# Altium PCB F_ROM.PcbDoc (part 3 of 3)
Units mil, origin at the board's own origin, x right, y up, seen from the top; angles counter-clockwise.
Board outline 10300 x 6600 mil, 2 copper layers (Top Layer, Bottom Layer); 788 components, 376 nets, 1392 pads, 0 vias.
Unrouted connection lines stored in the file: 465.
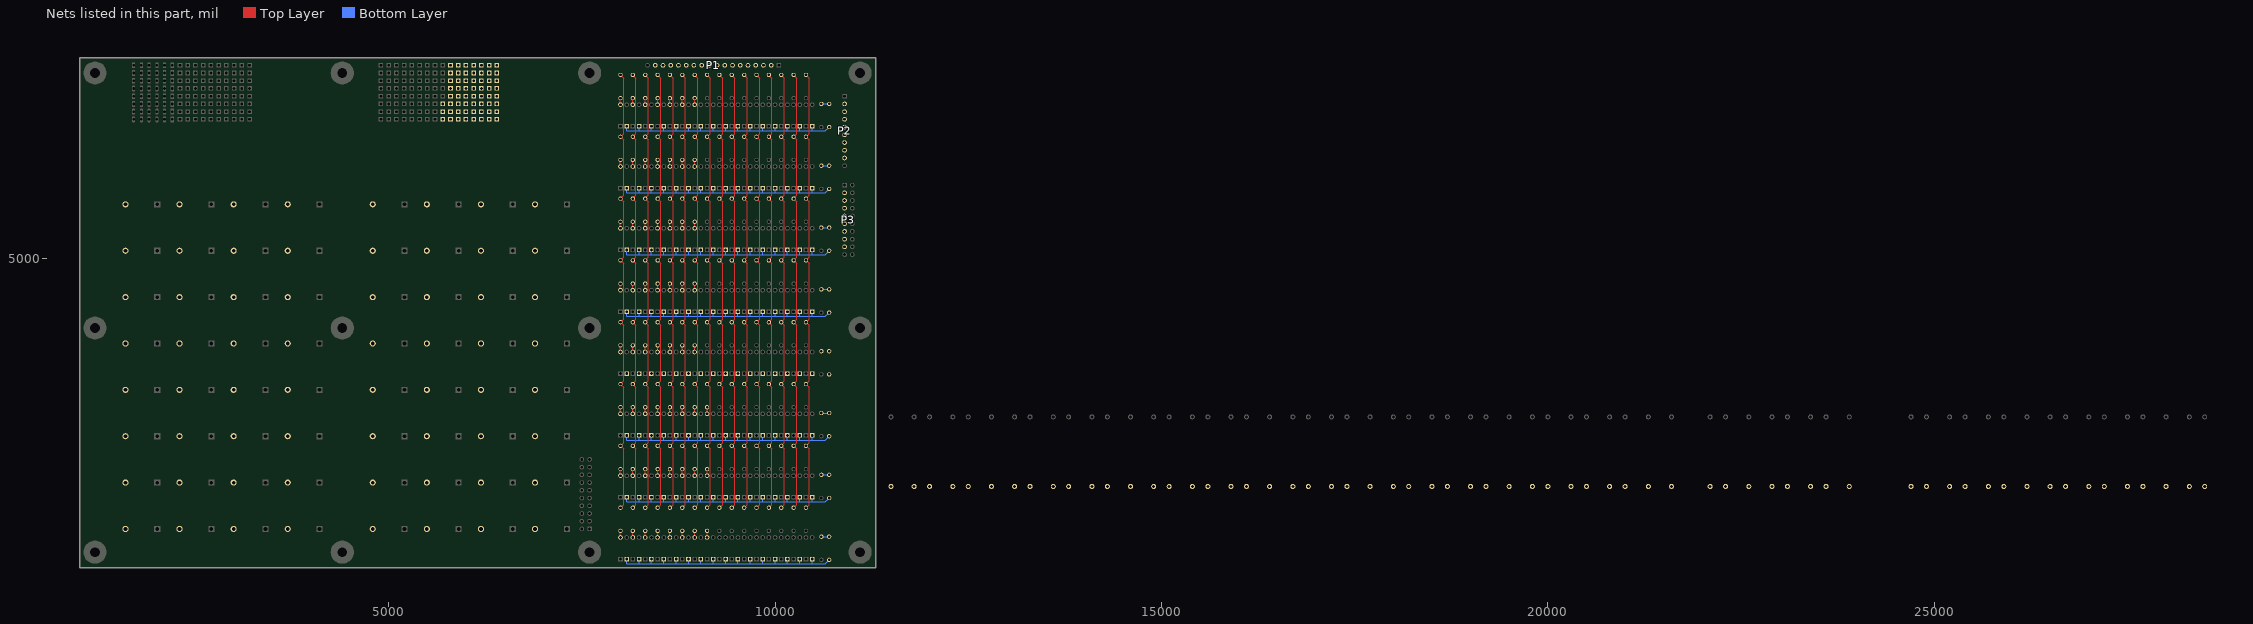
[diagram p3: the nets of this part, all layers, seen from the top]

## Nets (pads, with @x,y where several pads share a name; then routed paths per layer and width w, separated by ;. In a path a pad name is that pad's centre, name@x,y a point inside that pad or via, vN(x,y) a via of type N, cw(c..) or ccw(c..) an arc to the next point about the centre after c; other vN are vias at no path point) (continued)
NetB9_S6_1: B9_S6.1 D18_S6.1 R9_S6.1 | length 85.2
  Top Layer w6: D18_S6.1@9120,2989.76 R9_S6.1@9120,3075
NetB9_S7_1: B9_S7.1 D18_S7.1 R9_S7.1 | length 85.2
  Top Layer w6: D18_S7.1@9120,2189.76 R9_S7.1@9120,2275
NetB9_S8_1: B9_S8.1 D18_S8.1 R9_S8.1 | length 85.2
  Top Layer w6: D18_S8.1@9120,1389.76 R9_S8.1@9120,1475
NetB10_S1_1: B10_S1.1 D20_S1.1 R10_S1.1 | length 85.2
  Top Layer w6: D20_S1.1@8960,6989.76 R10_S1.1@8960,7075
NetB10_S2_1: B10_S2.1 D20_S2.1 R10_S2.1 | length 85.2
  Top Layer w6: D20_S2.1@8960,6189.76 R10_S2.1@8960,6275
NetB10_S3_1: B10_S3.1 D20_S3.1 R10_S3.1 | length 85.2
  Top Layer w6: D20_S3.1@8960,5389.76 R10_S3.1@8960,5475
NetB10_S4_1: B10_S4.1 D20_S4.1 R10_S4.1 | length 85.2
  Top Layer w6: D20_S4.1@8960,4589.76 R10_S4.1@8960,4675
NetB10_S5_1: B10_S5.1 D20_S5.1 R10_S5.1 | length 85.2
  Top Layer w6: D20_S5.1@8960,3789.76 R10_S5.1@8960,3875
NetB10_S6_1: B10_S6.1 D20_S6.1 R10_S6.1 | length 85.2
  Top Layer w6: D20_S6.1@8960,2989.76 R10_S6.1@8960,3075
NetB10_S7_1: B10_S7.1 D20_S7.1 R10_S7.1 | length 85.2
  Top Layer w6: D20_S7.1@8960,2189.76 R10_S7.1@8960,2275
NetB10_S8_1: B10_S8.1 D20_S8.1 R10_S8.1 | length 85.2
  Top Layer w6: D20_S8.1@8960,1389.76 R10_S8.1@8960,1475
NetB11_S1_1: B11_S1.1 D22_S1.1 R11_S1.1 | length 85.2
  Top Layer w6: D22_S1.1@8800,6989.76 R11_S1.1@8800,7075
NetB11_S2_1: B11_S2.1 D22_S2.1 R11_S2.1 | length 85.2
  Top Layer w6: D22_S2.1@8800,6189.76 R11_S2.1@8800,6275
NetB11_S3_1: B11_S3.1 D22_S3.1 R11_S3.1 | length 85.2
  Top Layer w6: D22_S3.1@8800,5389.76 R11_S3.1@8800,5475
NetB11_S4_1: B11_S4.1 D22_S4.1 R11_S4.1 | length 85.2
  Top Layer w6: D22_S4.1@8800,4589.76 R11_S4.1@8800,4675
NetB11_S5_1: B11_S5.1 D22_S5.1 R11_S5.1 | length 85.2
  Top Layer w6: D22_S5.1@8800,3789.76 R11_S5.1@8800,3875
NetB11_S6_1: B11_S6.1 D22_S6.1 R11_S6.1 | length 85.2
  Top Layer w6: D22_S6.1@8800,2989.76 R11_S6.1@8800,3075
NetB11_S7_1: B11_S7.1 D22_S7.1 R11_S7.1 | length 85.2
  Top Layer w6: D22_S7.1@8800,2189.76 R11_S7.1@8800,2275
NetB11_S8_1: B11_S8.1 D22_S8.1 R11_S8.1 | length 85.2
  Top Layer w6: D22_S8.1@8800,1389.76 R11_S8.1@8800,1475
NetB12_S1_1: B12_S1.1 D24_S1.1 R12_S1.1 | length 85.2
  Top Layer w6: D24_S1.1@8640,6989.76 R12_S1.1@8640,7075
NetB12_S2_1: B12_S2.1 D24_S2.1 R12_S2.1 | length 85.2
  Top Layer w6: D24_S2.1@8640,6189.76 R12_S2.1@8640,6275
NetB12_S3_1: B12_S3.1 D24_S3.1 R12_S3.1 | length 85.2
  Top Layer w6: D24_S3.1@8640,5389.76 R12_S3.1@8640,5475
NetB12_S4_1: B12_S4.1 D24_S4.1 R12_S4.1 | length 85.2
  Top Layer w6: D24_S4.1@8640,4589.76 R12_S4.1@8640,4675
NetB12_S5_1: B12_S5.1 D24_S5.1 R12_S5.1 | length 85.2
  Top Layer w6: D24_S5.1@8640,3789.76 R12_S5.1@8640,3875
NetB12_S6_1: B12_S6.1 D24_S6.1 R12_S6.1 | length 85.2
  Top Layer w6: D24_S6.1@8640,2989.76 R12_S6.1@8640,3075
NetB12_S7_1: B12_S7.1 D24_S7.1 R12_S7.1 | length 85.2
  Top Layer w6: D24_S7.1@8640,2189.76 R12_S7.1@8640,2275
NetB12_S8_1: B12_S8.1 D24_S8.1 R12_S8.1 | length 85.2
  Top Layer w6: D24_S8.1@8640,1389.76 R12_S8.1@8640,1475
NetB13_S1_1: B13_S1.1 D26_S1.1 R13_S1.1 | length 85.2
  Top Layer w6: D26_S1.1@8480,6989.76 R13_S1.1@8480,7075
NetB13_S2_1: B13_S2.1 D26_S2.1 R13_S2.1 | length 85.2
  Top Layer w6: D26_S2.1@8480,6189.76 R13_S2.1@8480,6275
NetB13_S3_1: B13_S3.1 D26_S3.1 R13_S3.1 | length 85.2
  Top Layer w6: D26_S3.1@8480,5389.76 R13_S3.1@8480,5475
NetB13_S4_1: B13_S4.1 D26_S4.1 R13_S4.1 | length 85.2
  Top Layer w6: D26_S4.1@8480,4589.76 R13_S4.1@8480,4675
NetB13_S5_1: B13_S5.1 D26_S5.1 R13_S5.1 | length 85.2
  Top Layer w6: D26_S5.1@8480,3789.76 R13_S5.1@8480,3875
NetB13_S6_1: B13_S6.1 D26_S6.1 R13_S6.1 | length 85.2
  Top Layer w6: D26_S6.1@8480,2989.76 R13_S6.1@8480,3075
NetB13_S7_1: B13_S7.1 D26_S7.1 R13_S7.1 | length 85.2
  Top Layer w6: D26_S7.1@8480,2189.76 R13_S7.1@8480,2275
NetB13_S8_1: B13_S8.1 D26_S8.1 R13_S8.1 | length 85.2
  Top Layer w6: D26_S8.1@8480,1389.76 R13_S8.1@8480,1475
NetB14_S1_1: B14_S1.1 D28_S1.1 R14_S1.1 | length 85.2
  Top Layer w6: D28_S1.1@8320,6989.76 R14_S1.1@8320,7075
NetB14_S2_1: B14_S2.1 D28_S2.1 R14_S2.1 | length 85.2
  Top Layer w6: D28_S2.1@8320,6189.76 R14_S2.1@8320,6275
NetB14_S3_1: B14_S3.1 D28_S3.1 R14_S3.1 | length 85.2
  Top Layer w6: D28_S3.1@8320,5389.76 R14_S3.1@8320,5475
NetB14_S4_1: B14_S4.1 D28_S4.1 R14_S4.1 | length 85.2
  Top Layer w6: D28_S4.1@8320,4589.76 R14_S4.1@8320,4675
NetB14_S5_1: B14_S5.1 D28_S5.1 R14_S5.1 | length 85.2
  Top Layer w6: D28_S5.1@8320,3789.76 R14_S5.1@8320,3875
NetB14_S6_1: B14_S6.1 D28_S6.1 R14_S6.1 | length 85.2
  Top Layer w6: D28_S6.1@8320,2989.76 R14_S6.1@8320,3075
NetB14_S7_1: B14_S7.1 D28_S7.1 R14_S7.1 | length 85.2
  Top Layer w6: D28_S7.1@8320,2189.76 R14_S7.1@8320,2275
NetB14_S8_1: B14_S8.1 D28_S8.1 R14_S8.1 | length 85.2
  Top Layer w6: D28_S8.1@8320,1389.76 R14_S8.1@8320,1475
NetB15_S1_1: B15_S1.1 D30_S1.1 R15_S1.1 | length 85.2
  Top Layer w6: D30_S1.1@8160,6989.76 R15_S1.1@8160,7075
NetB15_S2_1: B15_S2.1 D30_S2.1 R15_S2.1 | length 85.2
  Top Layer w6: D30_S2.1@8160,6189.76 R15_S2.1@8160,6275
NetB15_S3_1: B15_S3.1 D30_S3.1 R15_S3.1 | length 85.2
  Top Layer w6: D30_S3.1@8160,5389.76 R15_S3.1@8160,5475
NetB15_S4_1: B15_S4.1 D30_S4.1 R15_S4.1 | length 85.2
  Top Layer w6: D30_S4.1@8160,4589.76 R15_S4.1@8160,4675
NetB15_S5_1: B15_S5.1 D30_S5.1 R15_S5.1 | length 85.2
  Top Layer w6: D30_S5.1@8160,3789.76 R15_S5.1@8160,3875
NetB15_S6_1: B15_S6.1 D30_S6.1 R15_S6.1 | length 85.2
  Top Layer w6: D30_S6.1@8160,2989.76 R15_S6.1@8160,3075
NetB15_S7_1: B15_S7.1 D30_S7.1 R15_S7.1 | length 85.2
  Top Layer w6: D30_S7.1@8160,2189.76 R15_S7.1@8160,2275
NetB15_S8_1: B15_S8.1 D30_S8.1 R15_S8.1 | length 85.2
  Top Layer w6: D30_S8.1@8160,1389.76 R15_S8.1@8160,1475
NetB16_S1_1: B16_S1.1 D32_S1.1 R16_S1.1 | length 85.2
  Top Layer w6: D32_S1.1@8000,6989.76 R16_S1.1@8000,7075
NetB16_S2_1: B16_S2.1 D32_S2.1 R16_S2.1 | length 85.2
  Top Layer w6: D32_S2.1@8000,6189.76 R16_S2.1@8000,6275
NetB16_S3_1: B16_S3.1 D32_S3.1 R16_S3.1 | length 85.2
  Top Layer w6: D32_S3.1@8000,5389.76 R16_S3.1@8000,5475
NetB16_S4_1: B16_S4.1 D32_S4.1 R16_S4.1 | length 85.2
  Top Layer w6: D32_S4.1@8000,4589.76 R16_S4.1@8000,4675
NetB16_S5_1: B16_S5.1 D32_S5.1 R16_S5.1 | length 85.2
  Top Layer w6: D32_S5.1@8000,3789.76 R16_S5.1@8000,3875
NetB16_S6_1: B16_S6.1 D32_S6.1 R16_S6.1 | length 85.2
  Top Layer w6: D32_S6.1@8000,2989.76 R16_S6.1@8000,3075
NetB16_S7_1: B16_S7.1 D32_S7.1 R16_S7.1 | length 85.2
  Top Layer w6: D32_S7.1@8000,2189.76 R16_S7.1@8000,2275
NetB16_S8_1: B16_S8.1 D32_S8.1 R16_S8.1 | length 85.2
  Top Layer w6: D32_S8.1@8000,1389.76 R16_S8.1@8000,1475
NetD101_1: D101.1 L1.1
NetD102_1: D102.1 L2.1
NetD103_1: D103.1 L3.1
NetD104_1: D104.1 L4.1
NetD105_1: D105.1 L5.1
NetD106_1: D106.1 L6.1
NetD107_1: D107.1 L7.1
NetD108_1: D108.1 L8.1
NetD109_1: D109.1 L9.1
NetD110_1: D110.1 L10.1
NetD111_1: D111.1 L11.1
NetD112_1: D112.1 L12.1
NetD113_1: D113.1 L13.1
NetD114_1: D114.1 L14.1
NetD115_1: D115.1 L15.1
NetD116_1: D116.1 L16.1
NetD117_1: D117.1 L17.1
NetD118_1: D118.1 L18.1
NetD119_1: D119.1 L19.1
NetD120_1: D120.1 L20.1
NetD121_1: D121.1 L21.1
NetD122_1: D122.1 L22.1
NetD123_1: D123.1 L23.1
NetD124_1: D124.1 L24.1
NetD125_1: D125.1 L25.1
NetD126_1: D126.1 L26.1
NetD127_1: D127.1 L27.1
NetD128_1: D128.1 L28.1
NetD129_1: D129.1 L29.1
NetD130_1: D130.1 L30.1
NetD131_1: D131.1 L31.1
NetD132_1: D132.1 L32.1
NetD133_1: D133.1 L33.1
NetD134_1: D134.1 L34.1
NetD135_1: D135.1 L35.1
NetD136_1: D136.1 L36.1
NetD137_1: D137.1 L37.1
NetD138_1: D138.1 L38.1
NetD139_1: D139.1 L39.1
NetD140_1: D140.1 L40.1
NetD141_1: D141.1 L41.1
NetD142_1: D142.1 L42.1
NetD143_1: D143.1 L43.1
NetD144_1: D144.1 L44.1
NetD145_1: D145.1 L45.1
NetD146_1: D146.1 L46.1
NetD147_1: D147.1 L47.1
NetD148_1: D148.1 L48.1
NetD149_1: D149.1 L49.1
NetD150_1: D150.1 L50.1
NetD151_1: D151.1 L51.1
NetD152_1: D152.1 L52.1
NetD153_1: D153.1 L53.1
NetD154_1: D154.1 L54.1
NetD155_1: D155.1 L55.1
NetD156_1: D156.1 L56.1
NetD157_1: D157.1 L57.1
NetD158_1: D158.1 L58.1
NetD159_1: D159.1 L59.1
NetD160_1: D160.1 L60.1
NetD161_1: D161.1 L61.1
NetD162_1: D162.1 L62.1
NetD163_1: D163.1 L63.1
NetD164_1: D164.1 L64.1
P1: D1_S1.2 D3_S1.2 D5_S1.2 D7_S1.2 D9_S1.2 D11_S1.2 D13_S1.2 D15_S1.2 D17_S1.2 D19_S1.2 D21_S1.2 D23_S1.2 D25_S1.2 D27_S1.2 D29_S1.2 D31_S1.2 P3.3 R17_S1.1 | length 3596.7
  Bottom Layer w6: D31_S1.2@8080,6710.24 8080,6650.47 8240,6650.47 ; D29_S1.2@8240,6710.24 8240,6650.47 ; D27_S1.2@8400,6710.24 8400,6650.47 ; D25_S1.2@8560,6710.24 8560,6650.47 ; D23_S1.2@8720,6710.24 8720,6650.47 ; D21_S1.2@8880,6710.24 8880,6650.47 ; D19_S1.2@9040,6710.24 9040,6650.47 ; D17_S1.2@9200,6710.24 9200,6650.47 ; D15_S1.2@9360,6710.24 9360,6650.47 ; D13_S1.2@9520,6710.24 9520,6650.47 ; D11_S1.2@9680,6710.24 9680,6650.47 ; D9_S1.2@9840,6710.24 9840,6650.47 ; D7_S1.2@10000,6710.24 10000,6650.47 ; D5_S1.2@10160,6710.24 10160,6650.47 ; D3_S1.2@10320,6710.24 10320,6650.47 ; D1_S1.2@10480,6710.24 10480,6650.47 ; R17_S1.1@10700,6700 10650.47,6650.47 10480,6650.47 ; 8240,6650.47 8400,6650.47 ; 8400,6650.47 8560,6650.47 ; 8560,6650.47 8720,6650.47 ; 8720,6650.47 8880,6650.47 ; 8880,6650.47 9040,6650.47 ; 9040,6650.47 9200,6650.47 ; 9200,6650.47 9360,6650.47 ; 9360,6650.47 9520,6650.47 ; 9520,6650.47 9680,6650.47 ; 9680,6650.47 9840,6650.47 ; 9840,6650.47 10000,6650.47 ; 10000,6650.47 10160,6650.47 ; 10160,6650.47 10320,6650.47 ; 10320,6650.47 10480,6650.47
P2: D1_S2.2 D3_S2.2 D5_S2.2 D7_S2.2 D9_S2.2 D11_S2.2 D13_S2.2 D15_S2.2 D17_S2.2 D19_S2.2 D21_S2.2 D23_S2.2 D25_S2.2 D27_S2.2 D29_S2.2 D31_S2.2 P3.5 R17_S2.1 | length 3596.7
  Bottom Layer w6: D31_S2.2@8080,5910.24 8080,5850.47 8240,5850.47 ; D29_S2.2@8240,5910.24 8240,5850.47 ; D27_S2.2@8400,5910.24 8400,5850.47 ; D25_S2.2@8560,5910.24 8560,5850.47 ; D23_S2.2@8720,5910.24 8720,5850.47 ; D21_S2.2@8880,5910.24 8880,5850.47 ; D19_S2.2@9040,5910.24 9040,5850.47 ; D17_S2.2@9200,5910.24 9200,5850.47 ; D15_S2.2@9360,5910.24 9360,5850.47 ; D13_S2.2@9520,5910.24 9520,5850.47 ; D11_S2.2@9680,5910.24 9680,5850.47 ; D9_S2.2@9840,5910.24 9840,5850.47 ; D7_S2.2@10000,5910.24 10000,5850.47 ; D5_S2.2@10160,5910.24 10160,5850.47 ; D3_S2.2@10320,5910.24 10320,5850.47 ; D1_S2.2@10480,5910.24 10480,5850.47 ; R17_S2.1@10700,5900 10650.47,5850.47 10480,5850.47 ; 8240,5850.47 8400,5850.47 ; 8400,5850.47 8560,5850.47 ; 8560,5850.47 8720,5850.47 ; 8720,5850.47 8880,5850.47 ; 8880,5850.47 9040,5850.47 ; 9040,5850.47 9200,5850.47 ; 9200,5850.47 9360,5850.47 ; 9360,5850.47 9520,5850.47 ; 9520,5850.47 9680,5850.47 ; 9680,5850.47 9840,5850.47 ; 9840,5850.47 10000,5850.47 ; 10000,5850.47 10160,5850.47 ; 10160,5850.47 10320,5850.47 ; 10320,5850.47 10480,5850.47
P3: D1_S3.2 D3_S3.2 D5_S3.2 D7_S3.2 D9_S3.2 D11_S3.2 D13_S3.2 D15_S3.2 D17_S3.2 D19_S3.2 D21_S3.2 D23_S3.2 D25_S3.2 D27_S3.2 D29_S3.2 D31_S3.2 P3.7 R17_S3.1 | length 3596.7
  Bottom Layer w6: D31_S3.2@8080,5110.24 8080,5050.47 8240,5050.47 ; D29_S3.2@8240,5110.24 8240,5050.47 ; D27_S3.2@8400,5110.24 8400,5050.47 ; D25_S3.2@8560,5110.24 8560,5050.47 ; D23_S3.2@8720,5110.24 8720,5050.47 ; D21_S3.2@8880,5110.24 8880,5050.47 ; D19_S3.2@9040,5110.24 9040,5050.47 ; D17_S3.2@9200,5110.24 9200,5050.47 ; D15_S3.2@9360,5110.24 9360,5050.47 ; D13_S3.2@9520,5110.24 9520,5050.47 ; D11_S3.2@9680,5110.24 9680,5050.47 ; D9_S3.2@9840,5110.24 9840,5050.47 ; D7_S3.2@10000,5110.24 10000,5050.47 ; D5_S3.2@10160,5110.24 10160,5050.47 ; D3_S3.2@10320,5110.24 10320,5050.47 ; D1_S3.2@10480,5110.24 10480,5050.47 ; R17_S3.1@10700,5100 10650.47,5050.47 10480,5050.47 ; 8240,5050.47 8400,5050.47 ; 8400,5050.47 8560,5050.47 ; 8560,5050.47 8720,5050.47 ; 8720,5050.47 8880,5050.47 ; 8880,5050.47 9040,5050.47 ; 9040,5050.47 9200,5050.47 ; 9200,5050.47 9360,5050.47 ; 9360,5050.47 9520,5050.47 ; 9520,5050.47 9680,5050.47 ; 9680,5050.47 9840,5050.47 ; 9840,5050.47 10000,5050.47 ; 10000,5050.47 10160,5050.47 ; 10160,5050.47 10320,5050.47 ; 10320,5050.47 10480,5050.47
P4: D1_S4.2 D3_S4.2 D5_S4.2 D7_S4.2 D9_S4.2 D11_S4.2 D13_S4.2 D15_S4.2 D17_S4.2 D19_S4.2 D21_S4.2 D23_S4.2 D25_S4.2 D27_S4.2 D29_S4.2 D31_S4.2 P3.9 R17_S4.1 | length 3596.7
  Bottom Layer w6: D31_S4.2@8080,4310.24 8080,4250.47 8240,4250.47 ; D29_S4.2@8240,4310.24 8240,4250.47 ; D27_S4.2@8400,4310.24 8400,4250.47 ; D25_S4.2@8560,4310.24 8560,4250.47 ; D23_S4.2@8720,4310.24 8720,4250.47 ; D21_S4.2@8880,4310.24 8880,4250.47 ; D19_S4.2@9040,4310.24 9040,4250.47 ; D17_S4.2@9200,4310.24 9200,4250.47 ; D15_S4.2@9360,4310.24 9360,4250.47 ; D13_S4.2@9520,4310.24 9520,4250.47 ; D11_S4.2@9680,4310.24 9680,4250.47 ; D9_S4.2@9840,4310.24 9840,4250.47 ; D7_S4.2@10000,4310.24 10000,4250.47 ; D5_S4.2@10160,4310.24 10160,4250.47 ; D3_S4.2@10320,4310.24 10320,4250.47 ; D1_S4.2@10480,4310.24 10480,4250.47 ; R17_S4.1@10700,4300 10650.47,4250.47 10480,4250.47 ; 8240,4250.47 8400,4250.47 ; 8400,4250.47 8560,4250.47 ; 8560,4250.47 8720,4250.47 ; 8720,4250.47 8880,4250.47 ; 8880,4250.47 9040,4250.47 ; 9040,4250.47 9200,4250.47 ; 9200,4250.47 9360,4250.47 ; 9360,4250.47 9520,4250.47 ; 9520,4250.47 9680,4250.47 ; 9680,4250.47 9840,4250.47 ; 9840,4250.47 10000,4250.47 ; 10000,4250.47 10160,4250.47 ; 10160,4250.47 10320,4250.47 ; 10320,4250.47 10480,4250.47
P5: D1_S5.2 D3_S5.2 D5_S5.2 D7_S5.2 D9_S5.2 D11_S5.2 D13_S5.2 D15_S5.2 D17_S5.2 D19_S5.2 D21_S5.2 D23_S5.2 D25_S5.2 D27_S5.2 D29_S5.2 D31_S5.2 P3.11 R17_S5.1
P6: D1_S6.2 D3_S6.2 D5_S6.2 D7_S6.2 D9_S6.2 D11_S6.2 D13_S6.2 D15_S6.2 D17_S6.2 D19_S6.2 D21_S6.2 D23_S6.2 D25_S6.2 D27_S6.2 D29_S6.2 D31_S6.2 P3.13 R17_S6.1 | length 3596.7
  Bottom Layer w6: D31_S6.2@8080,2710.24 8080,2650.47 8240,2650.47 ; D29_S6.2@8240,2710.24 8240,2650.47 ; D27_S6.2@8400,2710.24 8400,2650.47 ; D25_S6.2@8560,2710.24 8560,2650.47 ; D23_S6.2@8720,2710.24 8720,2650.47 ; D21_S6.2@8880,2710.24 8880,2650.47 ; D19_S6.2@9040,2710.24 9040,2650.47 ; D17_S6.2@9200,2710.24 9200,2650.47 ; D15_S6.2@9360,2710.24 9360,2650.47 ; D13_S6.2@9520,2710.24 9520,2650.47 ; D11_S6.2@9680,2710.24 9680,2650.47 ; D9_S6.2@9840,2710.24 9840,2650.47 ; D7_S6.2@10000,2710.24 10000,2650.47 ; D5_S6.2@10160,2710.24 10160,2650.47 ; D3_S6.2@10320,2710.24 10320,2650.47 ; D1_S6.2@10480,2710.24 10480,2650.47 ; R17_S6.1@10700,2700 10650.47,2650.47 10480,2650.47 ; 8240,2650.47 8400,2650.47 ; 8400,2650.47 8560,2650.47 ; 8560,2650.47 8720,2650.47 ; 8720,2650.47 8880,2650.47 ; 8880,2650.47 9040,2650.47 ; 9040,2650.47 9200,2650.47 ; 9200,2650.47 9360,2650.47 ; 9360,2650.47 9520,2650.47 ; 9520,2650.47 9680,2650.47 ; 9680,2650.47 9840,2650.47 ; 9840,2650.47 10000,2650.47 ; 10000,2650.47 10160,2650.47 ; 10160,2650.47 10320,2650.47 ; 10320,2650.47 10480,2650.47
P7: D1_S7.2 D3_S7.2 D5_S7.2 D7_S7.2 D9_S7.2 D11_S7.2 D13_S7.2 D15_S7.2 D17_S7.2 D19_S7.2 D21_S7.2 D23_S7.2 D25_S7.2 D27_S7.2 D29_S7.2 D31_S7.2 P3.15 R17_S7.1 | length 3596.7
  Bottom Layer w6: D31_S7.2@8080,1910.24 8080,1850.47 8240,1850.47 ; D29_S7.2@8240,1910.24 8240,1850.47 ; D27_S7.2@8400,1910.24 8400,1850.47 ; D25_S7.2@8560,1910.24 8560,1850.47 ; D23_S7.2@8720,1910.24 8720,1850.47 ; D21_S7.2@8880,1910.24 8880,1850.47 ; D19_S7.2@9040,1910.24 9040,1850.47 ; D17_S7.2@9200,1910.24 9200,1850.47 ; D15_S7.2@9360,1910.24 9360,1850.47 ; D13_S7.2@9520,1910.24 9520,1850.47 ; D11_S7.2@9680,1910.24 9680,1850.47 ; D9_S7.2@9840,1910.24 9840,1850.47 ; D7_S7.2@10000,1910.24 10000,1850.47 ; D5_S7.2@10160,1910.24 10160,1850.47 ; D3_S7.2@10320,1910.24 10320,1850.47 ; D1_S7.2@10480,1910.24 10480,1850.47 ; R17_S7.1@10700,1900 10650.47,1850.47 10480,1850.47 ; 8240,1850.47 8400,1850.47 ; 8400,1850.47 8560,1850.47 ; 8560,1850.47 8720,1850.47 ; 8720,1850.47 8880,1850.47 ; 8880,1850.47 9040,1850.47 ; 9040,1850.47 9200,1850.47 ; 9200,1850.47 9360,1850.47 ; 9360,1850.47 9520,1850.47 ; 9520,1850.47 9680,1850.47 ; 9680,1850.47 9840,1850.47 ; 9840,1850.47 10000,1850.47 ; 10000,1850.47 10160,1850.47 ; 10160,1850.47 10320,1850.47 ; 10320,1850.47 10480,1850.47
P8: D1_S8.2 D3_S8.2 D5_S8.2 D7_S8.2 D9_S8.2 D11_S8.2 D13_S8.2 D15_S8.2 D17_S8.2 D19_S8.2 D21_S8.2 D23_S8.2 D25_S8.2 D27_S8.2 D29_S8.2 D31_S8.2 P3.17 R17_S8.1 | length 3596.7
  Bottom Layer w6: D31_S8.2@8080,1110.24 8080,1050.47 8240,1050.47 ; D29_S8.2@8240,1110.24 8240,1050.47 ; D27_S8.2@8400,1110.24 8400,1050.47 ; D25_S8.2@8560,1110.24 8560,1050.47 ; D23_S8.2@8720,1110.24 8720,1050.47 ; D21_S8.2@8880,1110.24 8880,1050.47 ; D19_S8.2@9040,1110.24 9040,1050.47 ; D17_S8.2@9200,1110.24 9200,1050.47 ; D15_S8.2@9360,1110.24 9360,1050.47 ; D13_S8.2@9520,1110.24 9520,1050.47 ; D11_S8.2@9680,1110.24 9680,1050.47 ; D9_S8.2@9840,1110.24 9840,1050.47 ; D7_S8.2@10000,1110.24 10000,1050.47 ; D5_S8.2@10160,1110.24 10160,1050.47 ; D3_S8.2@10320,1110.24 10320,1050.47 ; D1_S8.2@10480,1110.24 10480,1050.47 ; R17_S8.1@10700,1100 10650.47,1050.47 10480,1050.47 ; 8240,1050.47 8400,1050.47 ; 8400,1050.47 8560,1050.47 ; 8560,1050.47 8720,1050.47 ; 8720,1050.47 8880,1050.47 ; 8880,1050.47 9040,1050.47 ; 9040,1050.47 9200,1050.47 ; 9200,1050.47 9360,1050.47 ; 9360,1050.47 9520,1050.47 ; 9520,1050.47 9680,1050.47 ; 9680,1050.47 9840,1050.47 ; 9840,1050.47 10000,1050.47 ; 10000,1050.47 10160,1050.47 ; 10160,1050.47 10320,1050.47 ; 10320,1050.47 10480,1050.47
X1: P1.2 R1_S1.2 R1_S2.2 R1_S3.2 R1_S4.2 R1_S5.2 R1_S6.2 R1_S7.2 R1_S8.2 | length 5832
  Top Layer w6: R1_S8.2@10400,1775 10440,1815 10440,2535 R1_S7.2@10400,2575 10440,2615 10440,3335 R1_S6.2@10400,3375 10440,3415 10440,4135 R1_S5.2@10400,4175 10440,4215 10440,4935 R1_S4.2@10400,4975 10440,5015 10440,5735 R1_S3.2@10400,5775 10440,5815 10440,6535 R1_S2.2@10400,6575 10440,6615 10440,7335 R1_S1.2@10400,7375
X2: P1.3 R2_S1.2 R2_S2.2 R2_S3.2 R2_S4.2 R2_S5.2 R2_S6.2 R2_S7.2 R2_S8.2 | length 5832
  Top Layer w6: R2_S8.2@10240,1775 10280,1815 10280,2535 R2_S7.2@10240,2575 10280,2615 10280,3335 R2_S6.2@10240,3375 10280,3415 10280,4135 R2_S5.2@10240,4175 10280,4215 10280,4935 R2_S4.2@10240,4975 10280,5015 10280,5735 R2_S3.2@10240,5775 10280,5815 10280,6535 R2_S2.2@10240,6575 10280,6615 10280,7335 R2_S1.2@10240,7375
X3: P1.4 R3_S1.2 R3_S2.2 R3_S3.2 R3_S4.2 R3_S5.2 R3_S6.2 R3_S7.2 R3_S8.2 | length 5832
  Top Layer w6: R3_S8.2@10080,1775 10120,1815 10120,2535 R3_S7.2@10080,2575 10120,2615 10120,3335 R3_S6.2@10080,3375 10120,3415 10120,4135 R3_S5.2@10080,4175 10120,4215 10120,4935 R3_S4.2@10080,4975 10120,5015 10120,5735 R3_S3.2@10080,5775 10120,5815 10120,6535 R3_S2.2@10080,6575 10120,6615 10120,7335 R3_S1.2@10080,7375
X4: P1.5 R4_S1.2 R4_S2.2 R4_S3.2 R4_S4.2 R4_S5.2 R4_S6.2 R4_S7.2 R4_S8.2 | length 5832
  Top Layer w6: R4_S8.2@9920,1775 9960,1815 9960,2535 R4_S7.2@9920,2575 9960,2615 9960,3335 R4_S6.2@9920,3375 9960,3415 9960,4135 R4_S5.2@9920,4175 9960,4215 9960,4935 R4_S4.2@9920,4975 9960,5015 9960,5735 R4_S3.2@9920,5775 9960,5815 9960,6535 R4_S2.2@9920,6575 9960,6615 9960,7335 R4_S1.2@9920,7375
X5: P1.6 R5_S1.2 R5_S2.2 R5_S3.2 R5_S4.2 R5_S5.2 R5_S6.2 R5_S7.2 R5_S8.2 | length 5832
  Top Layer w6: R5_S8.2@9760,1774.76 9800,1814.76 9800,2534.76 9760,2574.76 9800,2614.76 9800,3334.76 9760,3374.76 9800,3414.76 9800,4134.76 9760,4174.76 9800,4214.76 9800,4934.76 9760,4974.76 9800,5014.76 9800,5734.76 9760,5774.76 9800,5814.76 9800,6534.76 9760,6574.76 9800,6614.76 9800,7334.76 R5_S1.2@9760,7374.76
X6: P1.7 R6_S1.2 R6_S2.2 R6_S3.2 R6_S4.2 R6_S5.2 R6_S6.2 R6_S7.2 R6_S8.2 | length 5832
  Top Layer w6: R6_S8.2@9600,1774.76 9640,1814.76 9640,2534.76 9600,2574.76 9640,2614.76 9640,3334.76 9600,3374.76 9640,3414.76 9640,4134.76 9600,4174.76 9640,4214.76 9640,4934.76 9600,4974.76 9640,5014.76 9640,5734.76 9600,5774.76 9640,5814.76 9640,6534.76 9600,6574.76 9640,6614.76 9640,7334.76 R6_S1.2@9600,7374.76
X7: P1.8 R7_S1.2 R7_S2.2 R7_S3.2 R7_S4.2 R7_S5.2 R7_S6.2 R7_S7.2 R7_S8.2 | length 5832
  Top Layer w6: R7_S8.2@9440,1774.76 9480,1814.76 9480,2534.76 9440,2574.76 9480,2614.76 9480,3334.76 9440,3374.76 9480,3414.76 9480,4134.76 9440,4174.76 9480,4214.76 9480,4934.76 9440,4974.76 9480,5014.76 9480,5734.76 9440,5774.76 9480,5814.76 9480,6534.76 9440,6574.76 9480,6614.76 9480,7334.76 R7_S1.2@9440,7374.76
X8: P1.9 R8_S1.2 R8_S2.2 R8_S3.2 R8_S4.2 R8_S5.2 R8_S6.2 R8_S7.2 R8_S8.2 | length 5832
  Top Layer w6: R8_S8.2@9280,1774.76 9320,1814.76 9320,2534.76 9280,2574.76 9320,2614.76 9320,3334.76 9280,3374.76 9320,3414.76 9320,4134.76 9280,4174.76 9320,4214.76 9320,4934.76 9280,4974.76 9320,5014.76 9320,5734.76 9280,5774.76 9320,5814.76 9320,6534.76 9280,6574.76 9320,6614.76 9320,7334.76 R8_S1.2@9280,7374.76
X9: P1.10 R9_S1.2 R9_S2.2 R9_S3.2 R9_S4.2 R9_S5.2 R9_S6.2 R9_S7.2 R9_S8.2 | length 5832
  Top Layer w6: R9_S8.2@9120,1775 9160,1815 9160,2535 R9_S7.2@9120,2575 9160,2615 9160,3335 R9_S6.2@9120,3375 9160,3415 9160,4135 R9_S5.2@9120,4175 9160,4215 9160,4935 R9_S4.2@9120,4975 9160,5015 9160,5735 R9_S3.2@9120,5775 9160,5815 9160,6535 R9_S2.2@9120,6575 9160,6615 9160,7335 R9_S1.2@9120,7375
X10: P1.11 R10_S1.2 R10_S2.2 R10_S3.2 R10_S4.2 R10_S5.2 R10_S6.2 R10_S7.2 R10_S8.2 | length 5832
  Top Layer w6: R10_S8.2@8960,1775 9000,1815 9000,2535 R10_S7.2@8960,2575 9000,2615 9000,3335 R10_S6.2@8960,3375 9000,3415 9000,4135 R10_S5.2@8960,4175 9000,4215 9000,4935 R10_S4.2@8960,4975 9000,5015 9000,5735 R10_S3.2@8960,5775 9000,5815 9000,6535 R10_S2.2@8960,6575 9000,6615 9000,7335 R10_S1.2@8960,7375
X11: P1.12 R11_S1.2 R11_S2.2 R11_S3.2 R11_S4.2 R11_S5.2 R11_S6.2 R11_S7.2 R11_S8.2 | length 5832
  Top Layer w6: R11_S8.2@8800,1775 8840,1815 8840,2535 R11_S7.2@8800,2575 8840,2615 8840,3335 R11_S6.2@8800,3375 8840,3415 8840,4135 R11_S5.2@8800,4175 8840,4215 8840,4935 R11_S4.2@8800,4975 8840,5015 8840,5735 R11_S3.2@8800,5775 8840,5815 8840,6535 R11_S2.2@8800,6575 8840,6615 8840,7335 R11_S1.2@8800,7375
X12: P1.13 R12_S1.2 R12_S2.2 R12_S3.2 R12_S4.2 R12_S5.2 R12_S6.2 R12_S7.2 R12_S8.2 | length 5832
  Top Layer w6: R12_S8.2@8640,1775 8680,1815 8680,2535 R12_S7.2@8640,2575 8680,2615 8680,3335 R12_S6.2@8640,3375 8680,3415 8680,4135 R12_S5.2@8640,4175 8680,4215 8680,4935 R12_S4.2@8640,4975 8680,5015 8680,5735 R12_S3.2@8640,5775 8680,5815 8680,6535 R12_S2.2@8640,6575 8680,6615 8680,7335 R12_S1.2@8640,7375
X13: P1.14 R13_S1.2 R13_S2.2 R13_S3.2 R13_S4.2 R13_S5.2 R13_S6.2 R13_S7.2 R13_S8.2 | length 5832
  Top Layer w6: R13_S8.2@8480,1775 8520,1815 8520,2535 R13_S7.2@8480,2575 8520,2615 8520,3335 R13_S6.2@8480,3375 8520,3415 8520,4135 R13_S5.2@8480,4175 8520,4215 8520,4935 R13_S4.2@8480,4975 8520,5015 8520,5735 R13_S3.2@8480,5775 8520,5815 8520,6535 R13_S2.2@8480,6575 8520,6615 8520,7335 R13_S1.2@8480,7375
X14: P1.15 R14_S1.2 R14_S2.2 R14_S3.2 R14_S4.2 R14_S5.2 R14_S6.2 R14_S7.2 R14_S8.2 | length 5832
  Top Layer w6: R14_S8.2@8320,1775 8360,1815 8360,2535 R14_S7.2@8320,2575 8360,2615 8360,3335 R14_S6.2@8320,3375 8360,3415 8360,4135 R14_S5.2@8320,4175 8360,4215 8360,4935 R14_S4.2@8320,4975 8360,5015 8360,5735 R14_S3.2@8320,5775 8360,5815 8360,6535 R14_S2.2@8320,6575 8360,6615 8360,7335 R14_S1.2@8320,7375
X15: P1.16 R15_S1.2 R15_S2.2 R15_S3.2 R15_S4.2 R15_S5.2 R15_S6.2 R15_S7.2 R15_S8.2 | length 5832
  Top Layer w6: R15_S8.2@8160,1775 8200,1815 8200,2535 R15_S7.2@8160,2575 8200,2615 8200,3335 R15_S6.2@8160,3375 8200,3415 8200,4135 R15_S5.2@8160,4175 8200,4215 8200,4935 R15_S4.2@8160,4975 8200,5015 8200,5735 R15_S3.2@8160,5775 8200,5815 8200,6535 R15_S2.2@8160,6575 8200,6615 8200,7335 R15_S1.2@8160,7375
X16: P1.17 R16_S1.2 R16_S2.2 R16_S3.2 R16_S4.2 R16_S5.2 R16_S6.2 R16_S7.2 R16_S8.2 | length 5832
  Top Layer w6: R16_S8.2@8000,1775 8040,1815 8040,2535 R16_S7.2@8000,2575 8040,2615 8040,3335 R16_S6.2@8000,3375 8040,3415 8040,4135 R16_S5.2@8000,4175 8040,4215 8040,4935 R16_S4.2@8000,4975 8040,5015 8040,5735 R16_S3.2@8000,5775 8040,5815 8040,6535 R16_S2.2@8000,6575 8040,6615 8040,7335 R16_S1.2@8000,7375
Y1: P2.2 R17_S1.2 R18_S1.1 | length 100
  Bottom Layer w6: R18_S1.1@10600,7000 R17_S1.2@10700,7000
Y2: P2.3 R17_S2.2 R18_S2.1 | length 100
  Bottom Layer w6: R18_S2.1@10600,6200 R17_S2.2@10700,6200
Y3: P2.4 R17_S3.2 R18_S3.1 | length 100
  Bottom Layer w6: R18_S3.1@10600,5400 R17_S3.2@10700,5400
Y4: P2.5 R17_S4.2 R18_S4.1 | length 100
  Bottom Layer w6: R18_S4.1@10600,4600 R17_S4.2@10700,4600
Y5: P2.6 R17_S5.2 R18_S5.1
Y6: P2.7 R17_S6.2 R18_S6.1 | length 100
  Bottom Layer w6: R18_S6.1@10600,3000 R17_S6.2@10700,3000
Y7: P2.8 R17_S7.2 R18_S7.1 | length 100
  Bottom Layer w6: R18_S7.1@10600,2200 R17_S7.2@10700,2200
Y8: P2.9 R17_S8.2 R18_S8.1 | length 100
  Bottom Layer w6: R18_S8.1@10600,1400 R17_S8.2@10700,1400
pads on no net: P1.1 P1.18 P2.1 P2.10 P3.1 P3.2 P3.19 P3.20 P4.1 P4.2 P4.19 P4.20

## Keep-outs
Keep-Out Layer:
  the board outline again, w10

## Text inside footprints (layer, text, board x,y; h text height)
P3: Top Overlay "20" at 10980,4990 h50 r270; Top Overlay "19" at 10880,4990 h50 r270; Top Overlay "1" at 10880,6050 h50 r270; Top Overlay "2" at 10980,6050 h50 r270
P4: Top Overlay "20" at 7520,2460 h50 r90; Top Overlay "19" at 7620,2460 h50 r90; Top Overlay "1" at 7620,1400 h50 r90; Top Overlay "2" at 7520,1400 h50 r90